# Allegro board artificiall_eye_ver00_bk20180624.brd
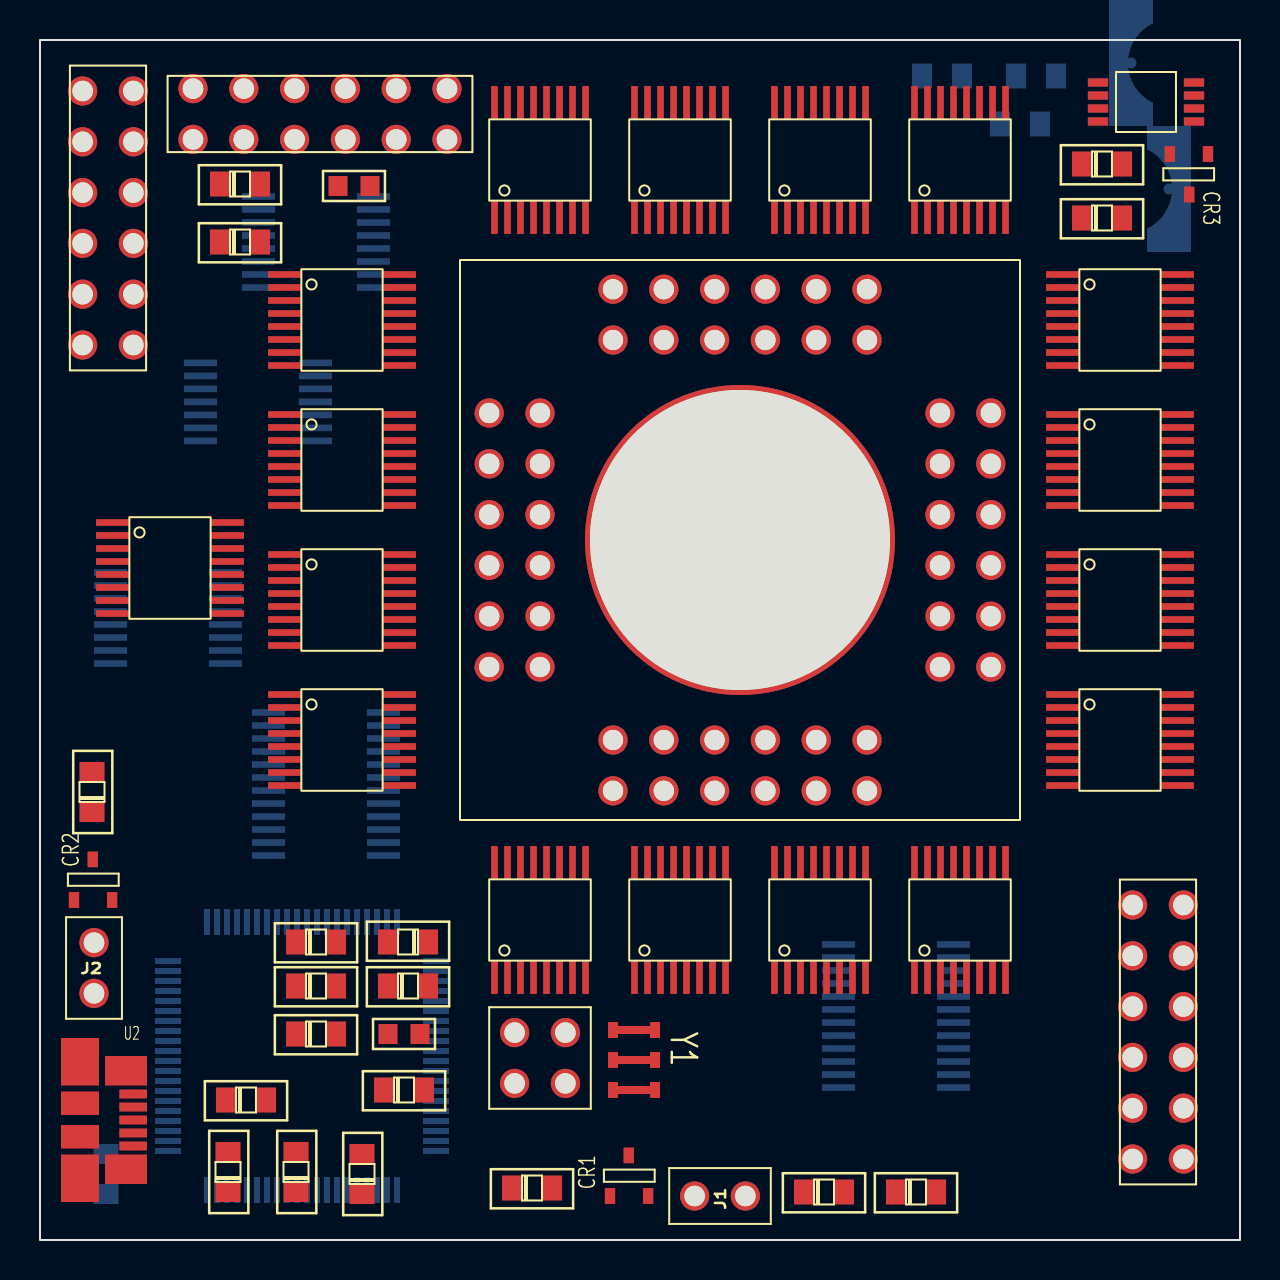
[diagram p0: board, top side]
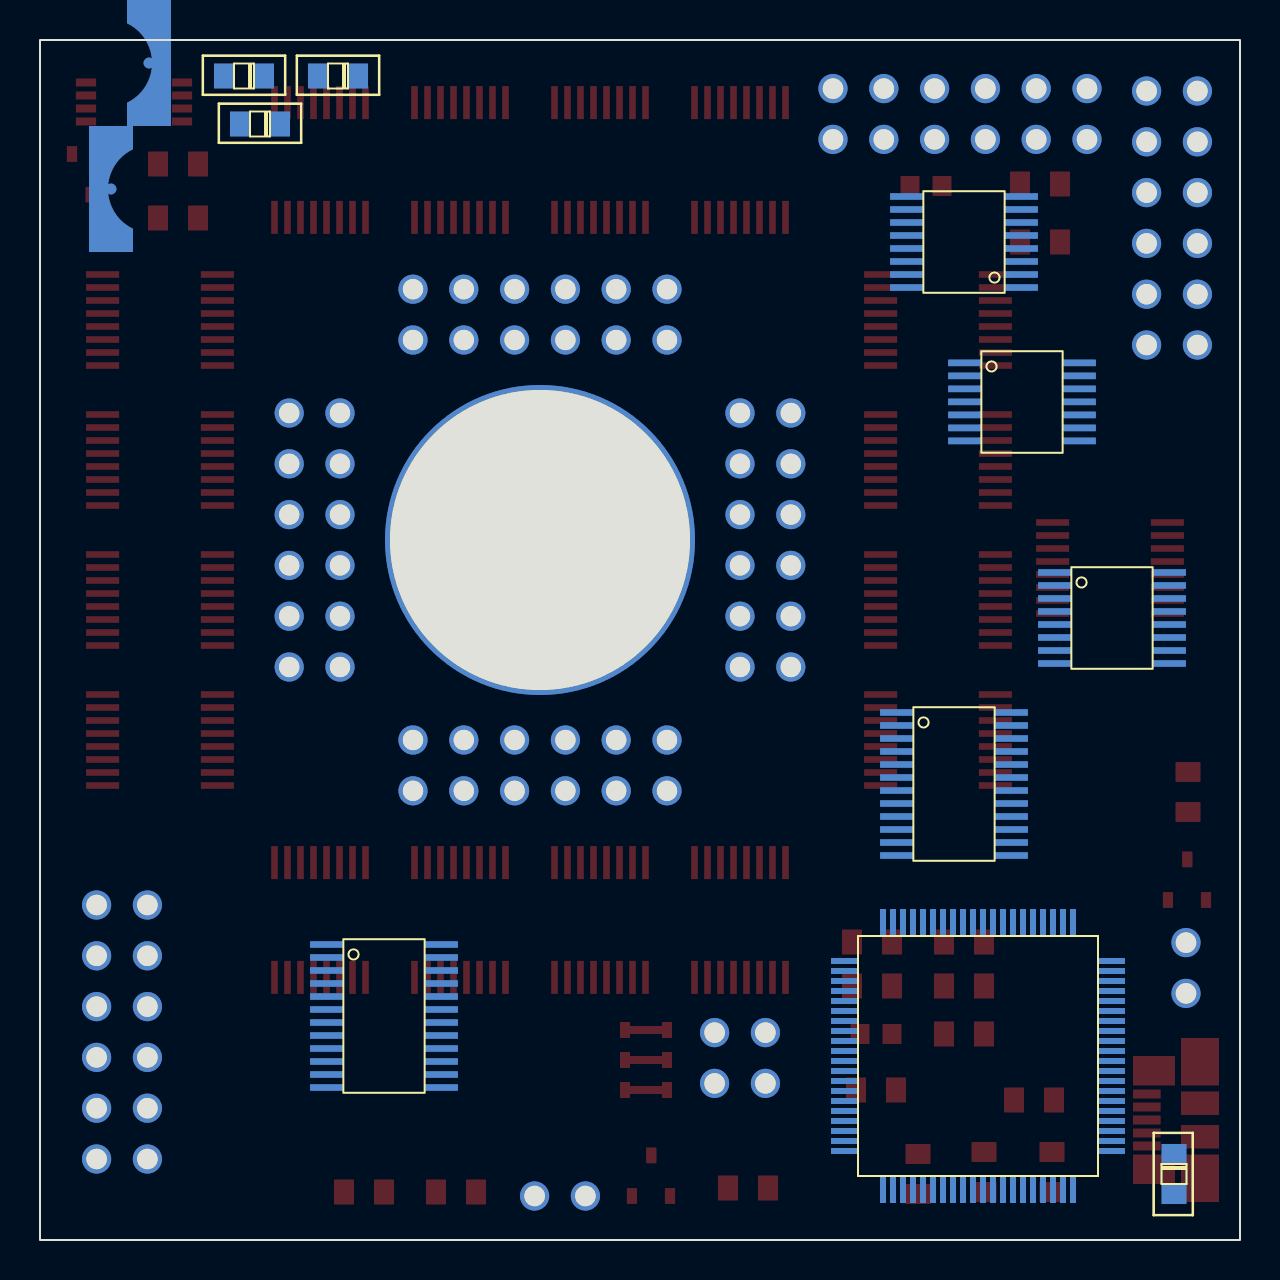
[diagram p1: board, bottom side, seen from below]

Outline 60 x 60 mm; copper layers: TOP, POWER, GROUND, BOTTOM. Coordinates in mm from the lower left corner of the outline.
Outline path: rectangle 0,0 60,60

## Design rules (mm)
nets with their own width: min track width 0.35; nets GND

## Placement (name value [footprint] x y rotation side)
C1  220nF  [RC0805_SMK]  24.6 2.6 0 top
C2  4.7uF  [RC0805_SMK]  2.6 22.4 90 top
C3  10pF  [RC0805_SMK]  18.4 14.9 180 top
C4  10pF  [RC0805_SMK]  13.8 10.3 0 top
C5  470nF  [RC0805_SMK]  9.4 3.4 90 top
C6  10uF  [RC0805_SMK]  10.3 7 0 top
C7  2.2nF  [RC0805_SMK]  39.2 2.4 0 top
C8  33nF  [RC0805_SMK]  49 55.8 0 bottom
C9  150pF  [RC0805_SMK]  45.1 58.2 0 bottom
C10  220nF  [RC0805_SMK]  18.2 7.5 0 top
C11  10uF  [RC0805_SMK]  16.1 3.3 90 top
C12  100nF  [RC0805_SMK]  12.8 3.4 90 top
CR1  ZHCS500  [SOT23_LONGERPADS]  28.5 2.2 90 top
CR2  ZHCS500  [SOT23_LONGERPADS]  1.7 17 90 top
CR3  ZHCS500  [SOT23_LONGERPADS]  58.4 54.3 270 top
J1  header 1x2  [HEADER1X2]  34 2.2 90 top
J2  header 1x2  [HEADER1X2]  2.7 13.6 0 top
L1  9uH  [FERRITE_BEAD]  55.5 55.7 90 bottom
R1  27  [RC0805_SMK]  13.8 14.9 0 top
R2  27  [RC0805_SMK]  13.8 12.7 0 top
R3  1M  [0603_SHN]  18.2 10.3 0 top
R4  1.4K  [RC0805_SMK]  18.4 12.7 0 top
R5  33K  [RC0805_SMK]  3.3 3.3 270 bottom
R6  47K  [RC0805_SMK]  43.8 2.4 0 top
R7  1M  [0603_SHN]  15.7 52.7 0 top
R8  10K  [RC0805_SMK]  10 52.8 0 top
R9  1.0K  [RC0805_SMK]  10 49.9 0 top
R10  38.3K  [RC0805_SMK]  53.1 51.1 0 top
R11  10K  [RC0805_SMK]  53.1 53.8 0 top
R12  34K  [RC0805_SMK]  49.8 58.2 0 bottom
U1  MSP430F5529  [MSP430F5529_LQFP80]  13.1 9.2 90 bottom
U2  micro_USB  [MICRO_USB]  2 6 0 top
U3  header_2x2  [HEADER_2X2]  25 9.1 180 top
U4  header2x6  [HEADER2X6]  14 56.3 90 top
U5  ADP1612_3  [MSOP8]  55.3 56.9 0 top
U6  header2x6  [HEADER2X6]  3.4 51.1 0 top
U7  74HC154PW  [TSSOP24]  42.8 12.5 180 bottom
U8  ADG1636  [TSSOP16]  6.5 33.6 0 top
U9  ADG1604  [TSSOP14]  10.9 41.9 180 bottom
U10  ADG1636  [TSSOP16]  13.8 49.9 0 bottom
U11  ADG1636  [TSSOP16]  6.4 31.1 180 bottom
U12  ADG1636  [TSSOP16]  25 54 90 top
U13  ADG1636  [TSSOP16]  32 54 90 top
U14  ADG1636  [TSSOP16]  39 54 90 top
U15  ADG1636  [TSSOP16]  46 54 90 top
U16  ADG1636  [TSSOP16]  15.1 46 0 top
U17  ADG1636  [TSSOP16]  54 46 0 top
U18  74HC154PW  [TSSOP24]  14.3 24.1 180 bottom
U19  ADG1636  [TSSOP16]  15.1 39 0 top
U21  ADG1636  [TSSOP16]  54 39 0 top
U22  ADG1636  [TSSOP16]  15.1 32 0 top
U23  ADG1636  [TSSOP16]  54 32 0 top
U24  ADG1636  [TSSOP16]  15.1 25 0 top
U25  ADG1636  [TSSOP16]  54 25 0 top
U26  ADG1636  [TSSOP16]  25 16 90 top
U27  ADG1636  [TSSOP16]  32 16 90 top
U28  ADG1636  [TSSOP16]  39 16 90 top
U29  ADG1636  [TSSOP16]  46 16 90 top
U30  header2x6  [HEADER2X6]  55.9 10.4 0 top
U31  Optic_nerve  [OPTICNERVE]  35 35 0 top
Y1  CST5.00MGW  [MURATA_OSC]  29.7 9 270 top

## Library data of the parts
C1 C3-C5 C7-C10 C12 = CAP NP
C2 C6 C11 = CAP
CR1-CR3 = DIODE_SCHOTTKY31
J1 J2 = header 1x2
L1 = INDUCTOR
R1-R12 = R
U1 = MSP430F5529
U2 = micro_USB
U3 = header_2x2
U4 U6 U30 = header2x6
U5 = ADP1612_3
U7 U18 = 74HC154PW
U8 U10-U17 U19 U21-U29 = ADG1636
U9 = ADG1604
U31 = Optic_nerve
Y1 = OSC6_SM

## Footprints (pads in the part's own frame, mm; a bottom-side part is the same pattern mirrored in y, then rotated)
0603_SHN
  rect 0.95x1 smd: 1(-0.8,0) 2(0.8,0)
FERRITE_BEAD
  custom 6.3x2.2 smd: 1(-3.15,0.95) 2(3.15,-0.95)
HEADER1X2
  round 1.46 hole 1.029: 1(0,1.27) 2(0,-1.27)
HEADER2X6
  round 1.46 hole 1.029: 1(-1.27,6.35) 2(-1.27,3.81) 3(-1.27,1.27) 4(-1.27,-1.27) 5(-1.27,-3.81) 6(-1.27,-6.35) 7(1.27,6.35) 8(1.27,3.81) 9(1.27,1.27) 10(1.27,-1.27) 11(1.27,-3.81) 12(1.27,-6.35)
HEADER_2X2
  round 1.46 hole 1.029: 1(-1.27,1.27) 2(-1.27,-1.27) 3(1.27,1.27) 4(1.27,-1.27)
MICRO_USB
  rect 1.38x0.45 smd: 1(2.66,1.3) 2(2.66,0.65) 3(2.66,0) 4(2.66,-0.65) 5(2.66,-1.3)
  rect 2.1x1.475 smd: 6(2.3,2.462) 7(2.3,-2.462)
  rect 1.9x2.375 smd: 8(0,2.913) 9(0,-2.913)
  rect 1.9x1.175 smd: 10(0,0.838) 11(0,-0.838)
MSOP8
  rect 1.016x0.406 smd: 1(-2.4,0.975) 2(-2.4,0.325) 3(-2.4,-0.325) 4(-2.4,-0.975) 5(2.4,-0.975) 6(2.4,-0.325) 7(2.4,0.325) 8(2.4,0.975)
MSP430F5529_LQFP80
  rect 1.3x0.3 smd: 1(-6.7,4.75) 2(-6.7,4.25) 3(-6.7,3.75) 4(-6.7,3.25) 5(-6.7,2.75) 6(-6.7,2.25) 7(-6.7,1.75) 8(-6.7,1.25) 9(-6.7,0.75) 10(-6.7,0.25) 11(-6.7,-0.25) 12(-6.7,-0.75) 13(-6.7,-1.25) 14(-6.7,-1.75) 15(-6.7,-2.25) 16(-6.7,-2.75) 17(-6.7,-3.25) 18(-6.7,-3.75) 19(-6.7,-4.25) 20(-6.7,-4.75) 41(6.7,-4.75) 42(6.7,-4.25) 43(6.7,-3.75) 44(6.7,-3.25) 45(6.7,-2.75) 46(6.7,-2.25) 47(6.7,-1.75) 48(6.7,-1.25) 49(6.7,-0.75) 50(6.7,-0.25) 51(6.7,0.25) 52(6.7,0.75) 53(6.7,1.25) 54(6.7,1.75) 55(6.7,2.25) 56(6.7,2.75) 57(6.7,3.25) 58(6.7,3.75) 59(6.7,4.25) 60(6.7,4.75)
  rect 0.3x1.3 smd: 21(-4.75,-6.7) 22(-4.25,-6.7) 23(-3.75,-6.7) 24(-3.25,-6.7) 25(-2.75,-6.7) 26(-2.25,-6.7) 27(-1.75,-6.7) 28(-1.25,-6.7) 29(-0.75,-6.7) 30(-0.25,-6.7) 31(0.25,-6.7) 32(0.75,-6.7) 33(1.25,-6.7) 34(1.75,-6.7) 35(2.25,-6.7) 36(2.75,-6.7) 37(3.25,-6.7) 38(3.75,-6.7) 39(4.25,-6.7) 40(4.75,-6.7) 61(4.75,6.7) 62(4.25,6.7) 63(3.75,6.7) 64(3.25,6.7) 65(2.75,6.7) 66(2.25,6.7) 67(1.75,6.7) 68(1.25,6.7) 69(0.75,6.7) 70(0.25,6.7) 71(-0.25,6.7) 72(-0.75,6.7) 73(-1.25,6.7) 74(-1.75,6.7) 75(-2.25,6.7) 76(-2.75,6.7) 77(-3.25,6.7) 78(-3.75,6.7) 79(-4.25,6.7) 80(-4.75,6.7)
MURATA_OSC
  custom 0.8x2.6 smd: 1(-1.5,0) 2(0,0) 3(1.5,0)
OPTICNERVE
  round 15.5 hole 15 unplated: (0,0)
  round 1.46 hole 1.02: 1(-12.54,6.35) 2(-12.54,3.81) 3(-12.54,1.27) 4(-12.54,-1.27) 5(-12.54,-3.81) 6(-12.54,-6.35) 7(-10,6.35) 8(-10,3.81) 9(-10,1.27) 10(-10,-1.27) 11(-10,-3.81) 12(-10,-6.35) 13(-6.35,-12.54) 14(-3.81,-12.54) 15(-1.27,-12.54) 16(1.27,-12.54) 17(3.81,-12.54) 18(6.35,-12.54) 19(-6.35,-10) 20(-3.81,-10) 21(-1.27,-10) 22(1.27,-10) 23(3.81,-10) 24(6.35,-10) 25(12.54,-6.35) 26(12.54,-3.81) 27(12.54,-1.27) 28(12.54,1.27) 29(12.54,3.81) 30(12.54,6.35) 31(10,-6.35) 32(10,-3.81) 33(10,-1.27) 34(10,1.27) 35(10,3.81) 36(10,6.35) 37(6.35,12.54) 38(3.81,12.54) 39(1.27,12.54) 40(-1.27,12.54) 41(-3.81,12.54) 42(-6.35,12.54) 43(6.35,10) 44(3.81,10) 45(1.27,10) 46(-1.27,10) 47(-3.81,10) 48(-6.35,10)
RC0805_SMK
  rect 1.001x1.25 smd: 1(-1.001,0) 2(1.001,0)
SOT23_LONGERPADS
  rect 0.79x0.513 smd: 1(0,0) 2(0,-1.905) 3(2.032,-0.94)
TSSOP14
  rect 1.651x0.33 smd: 1(-2.87,1.956) 2(-2.87,1.306) 3(-2.87,0.655) 4(-2.87,0.005) 5(-2.87,-0.645) 6(-2.87,-1.295) 7(-2.87,-1.946) 8(2.87,-1.946) 9(2.87,-1.295) 10(2.87,-0.645) 11(2.87,0.005) 12(2.87,0.655) 13(2.87,1.306) 14(2.87,1.956)
TSSOP16
  rect 1.651x0.33 smd: 1(-2.87,2.276) 2(-2.87,1.626) 3(-2.87,0.975) 4(-2.87,0.325) 5(-2.87,-0.325) 6(-2.87,-0.975) 7(-2.87,-1.626) 8(-2.87,-2.276) 9(2.87,-2.276) 10(2.87,-1.626) 11(2.87,-0.975) 12(2.87,-0.325) 13(2.87,0.325) 14(2.87,0.975) 15(2.87,1.626) 16(2.87,2.276)
TSSOP24
  rect 1.651x0.33 smd: 1(-2.87,2.276) 2(-2.87,1.626) 3(-2.87,0.975) 4(-2.87,0.325) 5(-2.87,-0.325) 6(-2.87,-0.975) 7(-2.87,-1.626) 8(-2.87,-2.276) 9(-2.87,-2.926) 10(-2.87,-3.576) 11(-2.87,-4.226) 12(-2.87,-4.876) 13(2.87,-4.876) 14(2.87,-4.226) 15(2.87,-3.576) 16(2.87,-2.926) 17(2.87,-2.276) 18(2.87,-1.626) 19(2.87,-0.975) 20(2.87,-0.325) 21(2.87,0.325) 22(2.87,0.975) 23(2.87,1.626) 24(2.87,2.276)

## Nets
5V_OR_EXT_0: U4.7(P7) U9.5(S2)
5V_OR_EXT_1: U4.8(P8) U8.2(S1A)
5V_OR_EXT_3: U4.9(P9) U11.2(S1A)
5V_OR_EXT_4: U4.10(P10) U11.10(S2A)
6V_REG_OUT: CR3.3(K) R10.1 U6.5(P5) U6.6(P6)
GND: C1.2 C2.2 C3.1 C4.1 C5.2 C6.2 C7.2 C8.1 C9.1 C10.2 C11.2 C12.2 R3.2 R5.2 R11.2 U1.14(AVSS1) U1.19(DVSS1) U1.49(DVSS2) U1.61(VSSU) U1.68(AVSS2) U2.5(GND) U5.4(GND) U7.12(GND) U7.19(NE1) U8.4(S1B) U8.5(VSS) U8.6(GND) U8.10(S2A) U9.3(VSS) U9.4(S1) U9.13(GND) U10.5(VSS) U10.6(GND) U11.4(S1B) U11.5(VSS) U11.6(GND) U11.12(S2B) U12.2(S1A) U12.5(VSS) U12.6(GND) U12.10(S2A) U13.2(S1A) U13.5(VSS) U13.6(GND) U13.10(S2A) U14.2(S1A) U14.5(VSS) U14.6(GND) U14.10(S2A) U15.2(S1A) U15.5(VSS) U15.6(GND) U15.10(S2A) U16.5(VSS) U16.6(GND) U17.5(VSS) U17.6(GND) U18.12(GND) U18.19(NE1) U19.5(VSS) U19.6(GND) U21.5(VSS) U21.6(GND) U22.5(VSS) U22.6(GND) U23.5(VSS) U23.6(GND) U24.5(VSS) U24.6(GND) U25.5(VSS) U25.6(GND) U26.2(S1A) U26.5(VSS) U26.6(GND) U26.10(S2A) U27.2(S1A) U27.5(VSS) U27.6(GND) U27.10(S2A) U28.2(S1A) U28.5(VSS) U28.6(GND) U28.10(S2A) U29.2(S1A) U29.5(VSS) U29.6(GND) U29.10(S2A) Y1.2
VCC3_3V: C6.1 J1.2 R6.2 U1.11(AVCC1) U1.18(DVCC1) U1.50(DVCC2) U4.5(P5) U4.6(P6) U7.24(VCC) U18.24(VCC)
VCC3_3V_OR_EXT_2: U4.11(P11) U8.12(S2B)
VCC5V: C2.1 CR2.3(K) L1.1 U1.65(VBUS) U4.1(P1) U4.2(P2) U4.3(P3) U4.4(P4) U5.3(EN) U5.6(VIN) U5.7(FREQ) U8.13(VDD) U8.14(EN) U9.2(EN) U9.12(VDD) U10.13(VDD) U10.14(EN) U11.13(VDD) U11.14(EN) U16.13(VDD) U16.14(EN) U17.13(VDD) U17.14(EN) U19.13(VDD) U19.14(EN) U21.13(VDD) U21.14(EN) U22.13(VDD) U22.14(EN) U23.13(VDD) U23.14(EN) U24.13(VDD) U24.14(EN) U25.13(VDD) U25.14(EN)
ADC_MEAS_R: U6.7(P7) U6.8(P8) U6.9(P9) U10.2(S1A)
ADC_MSP430: U1.77(P6.0/CB0/A0) U9.11(S3) U10.3(D1)
ADC_RES_CTRL: U1.37(P3.0/UCB0SIMO/UCB0SDA) U10.1(IN1)
ARRAY_MRG: U11.11(D2) U31.7(IO_07)
ARRAY_MRG_CTRL: U1.43(P3.6/TB0.6) U11.9(IN2)
ARRAY_RST: U11.3(D1) U31.6(IO_06)
ARRAY_RST_CTRL: U1.42(P3.5/TB0.5) U11.1(IN1)
ARRAY_VDD: U8.11(D2) U31.1(IO_01)
ARRAY_VDD_CTRL: U1.41(P3.4/UCA0RXD/UCA0SOMI) U8.9(IN2)
COL_0: U12.3(D1) U31.47(IO_47)
COL_1: U12.11(D2) U31.46(IO_46)
COL_2: U13.3(D1) U31.45(IO_45)
COL_3: U13.11(D2) U31.44(IO_44)
COL_4: U14.3(D1) U31.41(IO_41)
COL_5: U14.11(D2) U31.40(IO_40)
COL_6: U15.3(D1) U31.39(IO_39)
COL_7: U15.11(D2) U31.38(IO_38)
COL_8: U26.3(D1) U31.14(IO_14)
COL_9: U26.11(D2) U31.15(IO_15)
COL_10: U27.3(D1) U31.16(IO_16)
COL_11: U27.11(D2) U31.17(IO_17)
COL_12: U28.3(D1) U31.20(IO_20)
COL_13: U28.11(D2) U31.21(IO_21)
COL_14: U29.3(D1) U31.22(IO_22)
COL_15: U29.11(D2) U31.23(IO_23)
COL_ADD_0: U1.29(P2.0/TA1.1) U7.23(A0)
COL_ADD_1: U1.30(P2.1/TA1.2) U7.22(A1)
COL_ADD_2: U1.31(P2.2/TA2CLK/SMCLK) U7.21(A2)
COL_ADD_3: U1.32(P2.3/TA2.0) U7.20(A3)
COL_DEC_0: U7.1(NY0) U12.1(IN1)
COL_DEC_1: U7.2(NY1) U12.9(IN2)
COL_DEC_2: U7.3(NY2) U13.1(IN1)
COL_DEC_3: U7.4(NY3) U13.9(IN2)
COL_DEC_4: U7.5(NY4) U14.1(IN1)
COL_DEC_5: U7.6(NY5) U14.9(IN2)
COL_DEC_6: U7.7(NY6) U15.1(IN1)
COL_DEC_7: U7.8(NY7) U15.9(IN2)
COL_DEC_8: U7.9(NY8) U26.1(IN1)
COL_DEC_9: U7.10(NY9) U26.9(IN2)
COL_DEC_10: U7.11(NY10) U27.1(IN1)
COL_DEC_11: U7.13(NY11) U27.9(IN2)
COL_DEC_12: U7.14(NY12) U28.1(IN1)
COL_DEC_13: U7.15(NY13) U28.9(IN2)
COL_DEC_14: U7.16(NY14) U29.1(IN1)
COL_DEC_15: U7.17(NY15) U29.9(IN2)
COL_DEC_EN_N: U1.33(P2.4/TA2.1) U7.18(NE0)
COL_IN_SEL: U6.12(P12) U12.4(S1B) U12.12(S2B) U13.4(S1B) U13.12(S2B) U14.4(S1B) U14.12(S2B) U15.4(S1B) U15.12(S2B) U26.4(S1B) U26.12(S2B) U27.4(S1B) U27.12(S2B) U28.4(S1B) U28.12(S2B) U29.4(S1B) U29.12(S2B)
COL_SW_VDD: U6.11(P11) U12.13(VDD) U12.14(EN) U13.13(VDD) U13.14(EN) U14.13(VDD) U14.14(EN) U15.13(VDD) U15.14(EN) U26.13(VDD) U26.14(EN) U27.13(VDD) U27.14(EN) U28.13(VDD) U28.14(EN) U29.13(VDD) U29.14(EN)
HEADER_OUT1: U1.28(P1.7/TA1.0) U30.2(P2)
HEADER_OUT2: U1.36(P2.7/UCB0STE/UCA0CLK) U30.3(P3)
HEADER_OUT3: U1.44(P3.7/TB0OUTH/SVMOUT) U30.4(P4)
HEADER_OUT4: U1.45(P4.0/PM_UCB1STE/PM_UCA1CLK) U30.5(P5)
HEADER_OUT5: U1.46(P4.1/PM_UCB1SIMO/PM_UCB1SDA) U30.6(P6)
HEADER_OUT6: U1.47(P4.2/PM_UCB1SOMI/PM_UCB1SCL) U30.8(P8)
HEADER_OUT7: U1.48(P4.3/PM_UCB1CLK/PM_UCA1STE) U30.9(P9)
HEADER_OUT8: U1.51(P4.4/PM_UCA1TXD/PM_UCA1SIMO) U30.10(P10)
HEADER_OUT9: U1.52(P4.5/PM_UCA1RXD/PM_UCA1SOMI) U30.11(P11)
HEADER_OUT10: U1.78(P6.1/CB1/A1) U30.12(P12)
MEAS_EXT: U6.10(P10) U9.10(S4)
ROW_0: U16.3(D1) U31.2(IO_02)
ROW_1: U16.11(D2) U31.3(IO_03)
ROW_2: U19.3(D1) U31.4(IO_04)
ROW_3: U19.11(D2) U31.5(IO_05)
ROW_4: U22.3(D1) U31.8(IO_08)
ROW_5: U22.11(D2) U31.9(IO_09)
ROW_6: U24.3(D1) U31.10(IO_10)
ROW_7: U24.11(D2) U31.11(IO_11)
ROW_8: U17.3(D1) U31.35(IO_35)
ROW_9: U17.11(D2) U31.34(IO_34)
ROW_10: U21.3(D1) U31.33(IO_33)
ROW_11: U21.11(D2) U31.32(IO_32)
ROW_12: U23.3(D1) U31.29(IO_29)
ROW_13: U23.11(D2) U31.28(IO_28)
ROW_14: U25.3(D1) U31.27(IO_27)
ROW_15: U25.11(D2) U31.26(IO_26)
ROW_ADD_0: U1.21(P1.0/TA0CLK/ACLK) U18.23(A0)
ROW_ADD_1: U1.22(P1.1/TA0.0) U18.22(A1)
ROW_ADD_2: U1.23(P1.2/TA0.1) U18.21(A2)
ROW_ADD_3: U1.24(P1.3/TA0.2) U18.20(A3)
ROW_DEC_0: U16.1(IN1) U18.1(NY0)
ROW_DEC_1: U16.9(IN2) U18.2(NY1)
ROW_DEC_2: U18.3(NY2) U19.1(IN1)
ROW_DEC_3: U18.4(NY3) U19.9(IN2)
ROW_DEC_4: U18.5(NY4) U22.1(IN1)
ROW_DEC_5: U18.6(NY5) U22.9(IN2)
ROW_DEC_6: U18.7(NY6) U24.1(IN1)
ROW_DEC_7: U18.8(NY7) U24.9(IN2)
ROW_DEC_8: U17.1(IN1) U18.9(NY8)
ROW_DEC_9: U17.9(IN2) U18.10(NY9)
ROW_DEC_10: U18.11(NY10) U21.1(IN1)
ROW_DEC_11: U18.13(NY11) U21.9(IN2)
ROW_DEC_12: U18.14(NY12) U23.1(IN1)
ROW_DEC_13: U18.15(NY13) U23.9(IN2)
ROW_DEC_14: U18.16(NY14) U25.1(IN1)
ROW_DEC_15: U18.17(NY15) U25.9(IN2)
ROW_DEC_EN_N: U1.25(P1.4/TA0.3) U18.18(NE0)
ROW_IN_SEL: U9.6(D) U16.4(S1B) U16.12(S2B) U17.4(S1B) U17.12(S2B) U19.4(S1B) U19.12(S2B) U21.4(S1B) U21.12(S2B) U22.4(S1B) U22.12(S2B) U23.4(S1B) U23.12(S2B) U24.4(S1B) U24.12(S2B) U25.4(S1B) U25.12(S2B)
ROW_IN_SEL_CTRL0: U1.38(P3.1/UCB0SOMI/UCB0SCL) U9.1(A0)
ROW_IN_SEL_CTRL1: U1.39(P3.2/UCB0CLK/UCA0STE) U9.14(A1)
ROW_IN_UNSEL: U8.3(D1) U16.2(S1A) U16.10(S2A) U17.2(S1A) U17.10(S2A) U19.2(S1A) U19.10(S2A) U21.2(S1A) U21.10(S2A) U22.2(S1A) U22.10(S2A) U23.2(S1A) U23.10(S2A) U24.2(S1A) U24.10(S2A) U25.2(S1A) U25.10(S2A)
ROW_IN_UNSEL_CTRL: U1.40(P3.3/UCA0TXD/UCA0SIMO) U8.1(IN1)
VREFM: U1.10(P5.1/A9/VREF-/VEREF-) U30.7(P7)
VREFP: C11.1 C12.1 U1.9(P5.0/A8/VREF+/VEREF+) U30.1(P1)
N13187266: R7.1 R8.1 R9.1 U4.12(P12)
N13196250: CR3.1(A) L1.2 U5.5(SW)
N13196262: R10.2 R11.1 U5.2(FB)
N13196294: R12.2 U5.1(COMP)
N13196302: C9.2 R12.1
N13196326: C8.2 U5.8(SS)
N13248787: R5.1 U2.6(S1) U2.7(S2) U2.8(S3) U2.9(S4) U2.10(S5) U2.11(S6)
N13249241: R2.1 U2.3(D+)
N13249245: R1.1 U2.2(D-)
N13261184: C4.2 R2.2 R3.1 R4.1 U1.62(PU.0/DP)
N13262575: C3.2 R1.2 U1.64(PU.1/DM)
N13281571: C1.1 CR1.1(A) U1.66(VUSB)
N13289262: C7.1 R6.1 U1.76(NRST/NMI/SBWTDIO)
N13290467: C5.1 U1.20(VCORE)
N13297750: U3.1(P1) Y1.3
N13297765: U3.2(P2) Y1.1
N13310346: C10.1 U1.67(V18)
N131865130: R7.2 U6.1(P1)
N131865131: R8.2 U6.2(P2)
N131865132: R9.2 U6.3(P3)
N132488690: J2.2 U2.1(VBUS)
N132492920: CR2.1(A) J2.1
N132698311: CR1.3(K) J1.1
N1324771962: R4.2 U1.63(PUR)
N1324771968: U1.69(P5.2/XT2IN) U3.3(P3)
N1324771969: U1.70(P5.3/XT2OUT) U3.4(P4)

Pads without a net: CR1 2; CR2 2; CR3 2; U1 1 2 3 4 5 6 7 8 12 13 15 16 17 26 27 34 35 53 54 55 56 57 58 59 60 71 72 73 74 75 79 80; U2 4; U6 4; U8 7 8 15 16; U9 7 8 9; U10 4 7 8 9 10 11 12 15 16; U11 7 8 15 16; U12 7 8 15 16; U13 7 8 15 16; U14 7 8 15 16; U15 7 8 15 16; U16 7 8 15 16; U17 7 8 15 16; U19 7 8 15 16; U21 7 8 15 16; U22 7 8 15 16; U23 7 8 15 16; U24 7 8 15 16; U25 7 8 15 16; U26 7 8 15 16; U27 7 8 15 16; U28 7 8 15 16; U29 7 8 15 16; U31 12 13 18 19 24 25 30 31 36 37 42 43 48

## Routing (per net, layer and track width the routed paths; a pad name or vN(x,y) marks a point on that pad's centre or on a via; arc(x,y) is an arc through that point)
VCC3_3V: length 3.6
  POWER w0.5: 35.27,1.29 J1.2 ; J1.2 36.18,2.2 ; J1.2 34.36,2.2 ; J1.2 35.27,3.11
VCC5V: length 14.5
  POWER w0.5: 12.73,54.12 U4.3 ; U4.3 12.73,55.94 ; U4.3 11.82,55.03 ; U4.3 13.64,55.03 ; 15.27,54.12 U4.4 ; U4.4 16.18,55.03 ; U4.4 14.36,55.03 ; U4.4 15.27,55.94 ; U4.2 10.19,55.94 ; U4.2 9.28,55.03 ; U4.2 10.19,54.12 ; U4.2 11.1,55.03 ; U4.1 7.65,55.94 ; U4.1 6.74,55.03 ; U4.1 7.65,54.12 ; U4.1 8.56,55.03

## Copper pours and planes (outline as drawn; the poured copper is in the pictures)
GND on GROUND: 0.5,0.5 0.5,59.5 59.5,59.5 59.5,0.5
VCC3_3V on POWER: 31,0.5 31,59.5 59.5,59.5 59.5,0.5
VCC5V on POWER: 0.5,0.5 0.5,59.5 29,59.5 29,0.5
